# Altium PCB 莱洛三角形PCB_2022-04-17.pcbdoc (part 1 of 2)
Units mm, origin at the board's own origin, x right, y up, seen from the top; angles counter-clockwise.
Board outline 174.24 x 150.62 mm, 2 copper layers (Top Layer, Bottom Layer); 157 components, 93 nets, 468 pads, 212 vias.
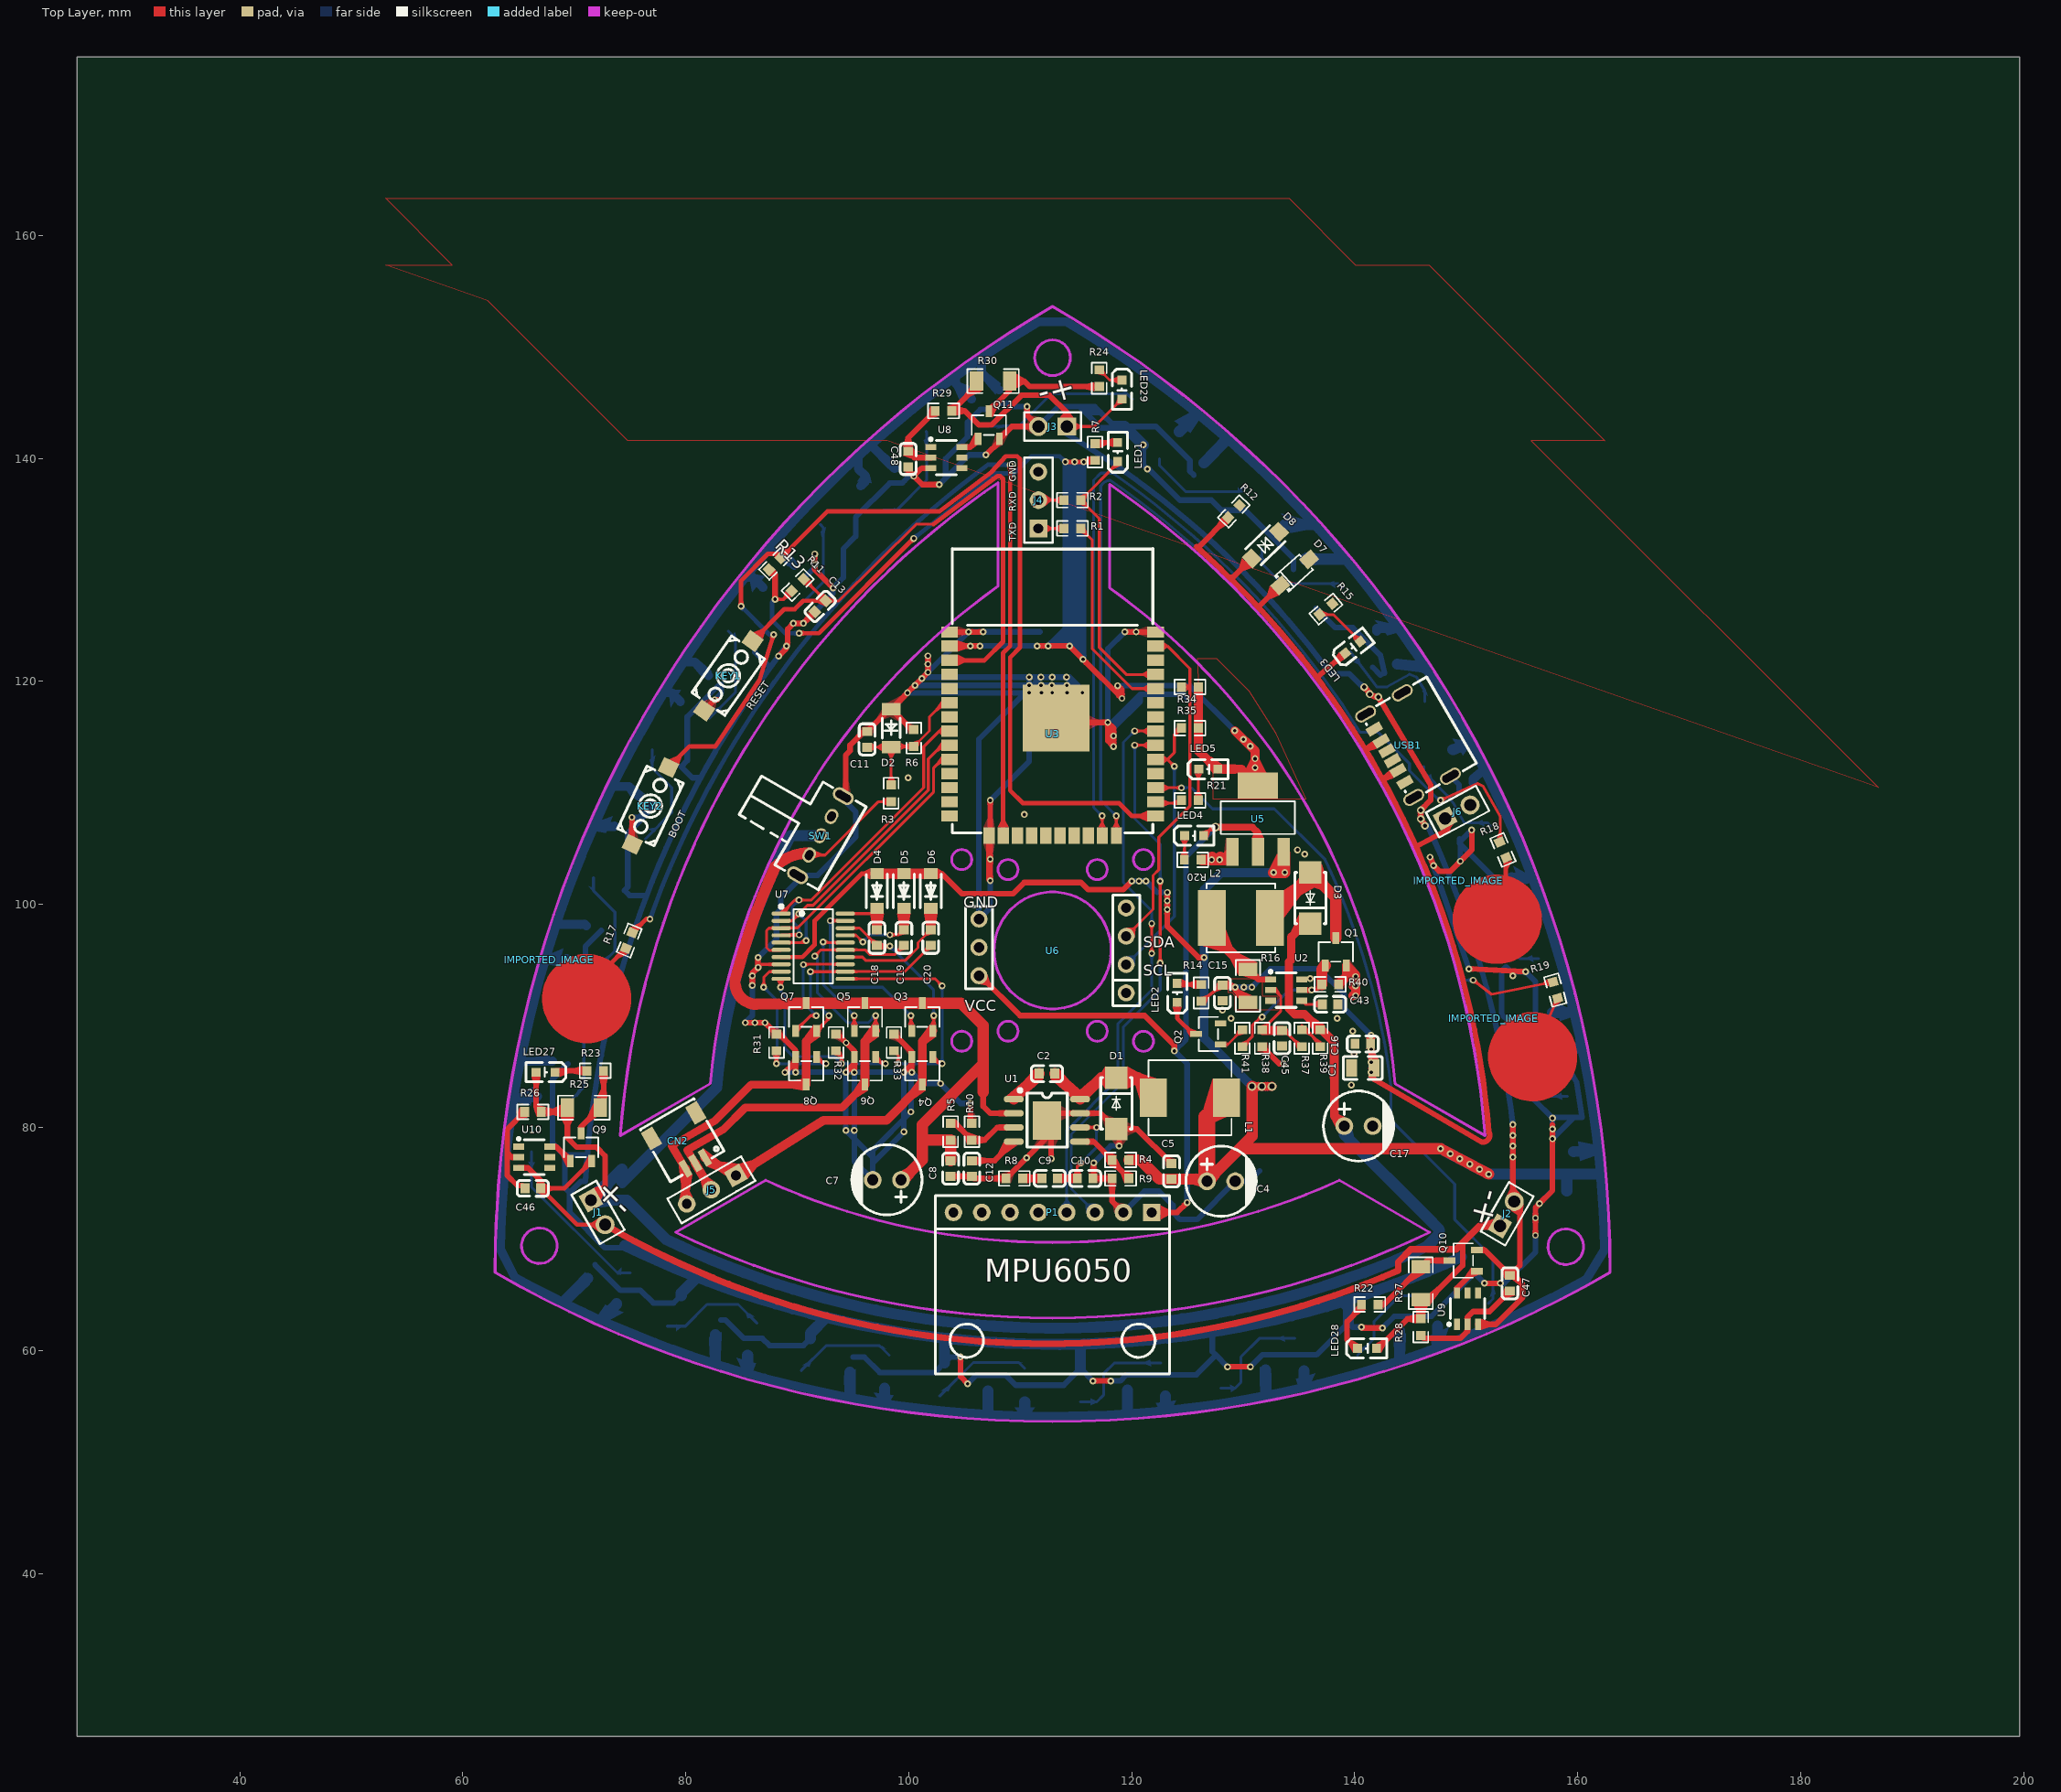
[diagram p0: Top Layer view]
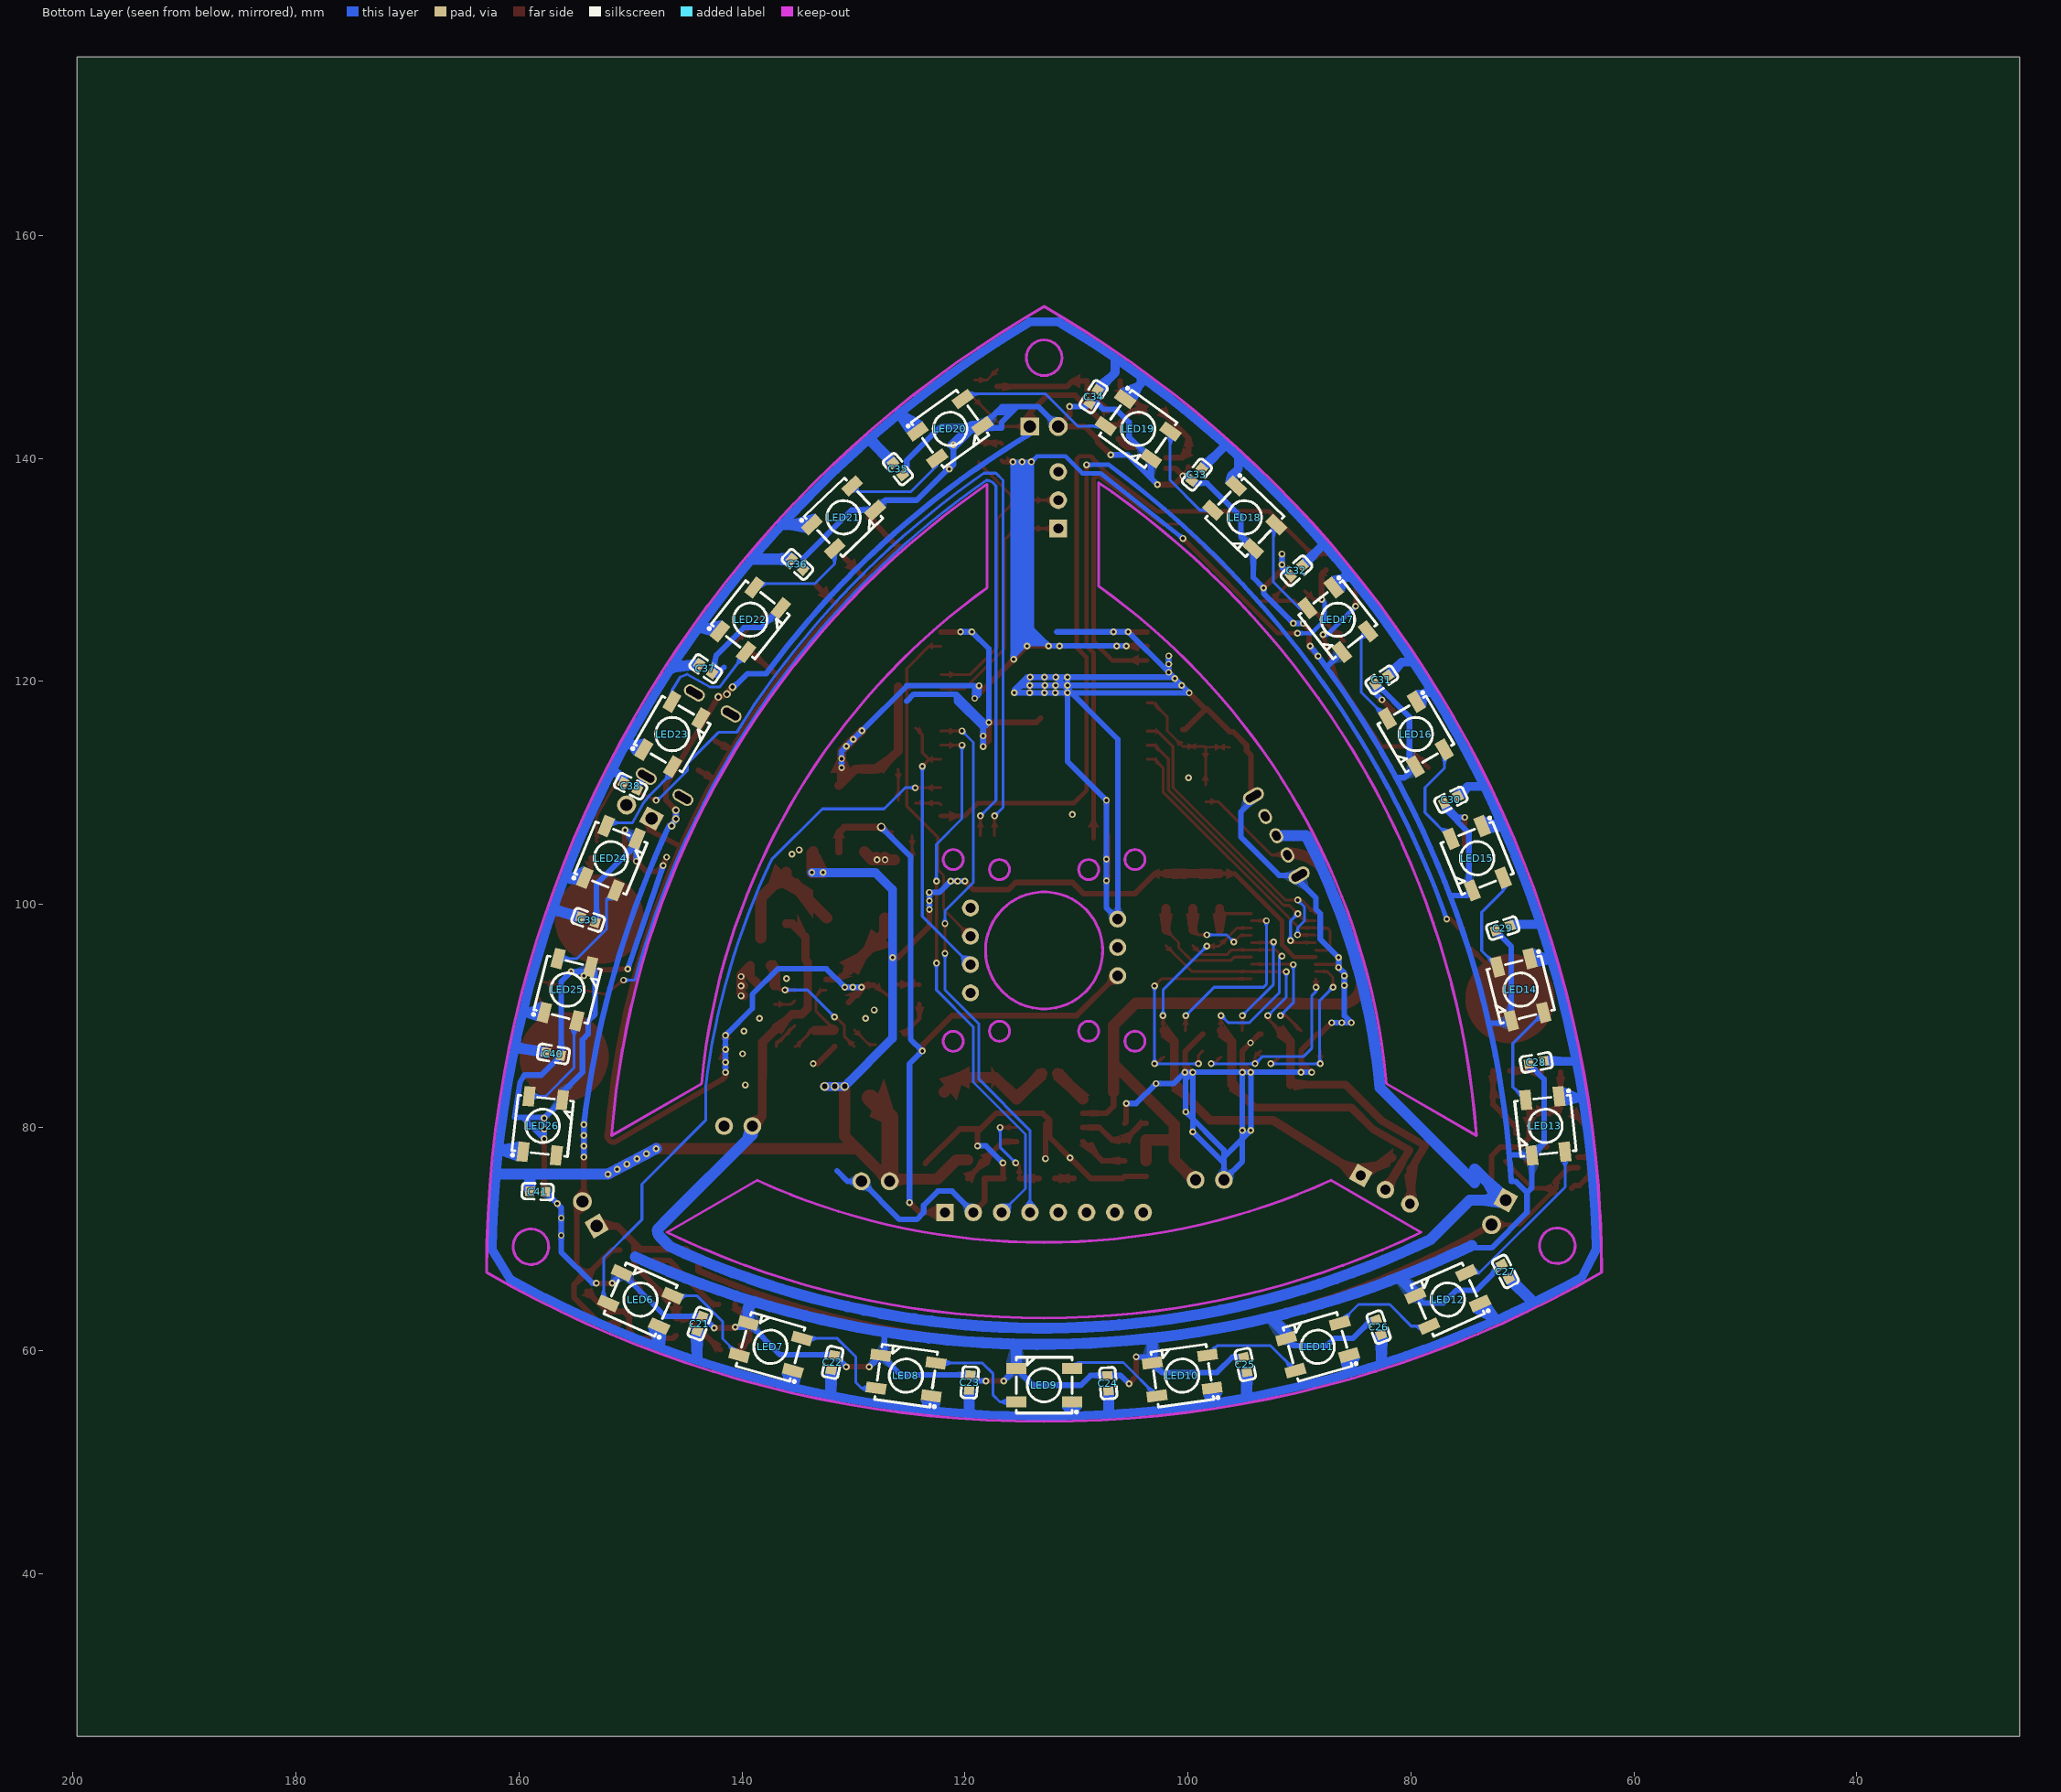
[diagram p1: Bottom Layer view, seen from below]

## Layer stack, top to bottom
Top Layer: signal copper (thickness not stored)
Dielectric: dielectric 0.32, FR-4, Dk 4.8
Bottom Layer: signal copper (thickness not stored)

## Board outline
199.644,25.4 25.4,25.4 25.4,176.022 199.644,176.022

## Components (designator, comment, footprint, x,y, rotation, side; value= is the part's Value field where it differs from the comment)
C1 "22UF" C0805 140.716,85.331 r0 top
C2 "100nF" C0603#1 112.395,84.823 r180 top
C4 "47uF" CAP-TH_BD6.3-P2.50-D1.0-FD 128.016,75.171 r0 top
C5 "100nF" C0603#1 123.571,76.06 r270 top
C7 "47uF" CAP-TH_BD6.3-P2.50-D1.0-FD 98.044,75.298 r180 top
C8 "10nF" C0603#1 103.759,76.314 r90 top
C9 "1nF" C0603#1 112.653,75.425 r0 top
C10 "47pF" C0603#1 115.821,75.425 r180 top
C11 "10nF" C0603#1 96.266,114.795 r270 top
C12 "10nF" C0603#1 105.664,76.314 r90 top
C13 "100nF" C0603#1 92.075,126.733 r45 top
C15 "1uF" C0603#1 128.143,92.062 r90 top
C16 "100nF" C0603#1 140.716,87.49 r180 top
C17 "100uF" CAP-TH_BD6.3-P2.50-D1.0-FD 140.335,80.124 r0 top
C18 "100nF" C0603#1 97.155,97.015 r90 top
C19 "100nF" C0603#1 99.568,97.015 r90 top
C20 "100nF" C0603#1 101.981,97.015 r90 top
C21 "100nF" C0603#2 143.78,62.4 r110.3 bottom
C22 "100nF" C0603#2 131.863,58.915 r102.3 bottom
C23 "100nF" C0603#2 119.576,57.123 r94.3 bottom
C24 "100nF" C0603#2 107.16,57.058 r86.3 bottom
C25 "100nF" C0603#2 94.855,58.721 r78.3 bottom
C26 "100nF" C0603#2 82.902,62.081 r70.3 bottom
C27 "100nF" C0603#2 71.532,67.072 r62.3 bottom
C28 "100nF" C0603#2 68.755,85.827 r350 bottom
C29 "100nF" C0603#2 71.759,97.875 r342 bottom
C30 "100nF" C0603#2 76.41,109.387 r334 bottom
C31 "100nF" C0603#2 82.619,120.14 r326 bottom
C32 "100nF" C0603#2 90.263,129.925 r318 bottom
C33 "100nF" C0603#2 99.195,138.55 r310 bottom
C34 "100nF" C0603#2 108.458,145.542 r302 bottom
C35 "100nF" C0603#2 126.014,139.047 r230.5 bottom
C36 "100nF" C0603#2 135.021,130.5 r222.5 bottom
C37 "100nF" C0603#2 143.256,121.145 r214.5 bottom
C38 "100nF" C0603#2 149.987,110.604 r206.5 bottom
C39 "100nF" C0603#2 153.804,98.612 r198.5 bottom
C40 "100nF" C0603#2 156.913,86.591 r190.5 bottom
C41 "100nF" C0603#2 158.318,74.254 r182.5 bottom
C43 "4.7uF" C0603#1 137.795,91.046 r180 top
C45 "22pF" C0603#1 133.477,87.998 r270 top
C46 "100nF" C0603#1 66.294,74.536 r0 top
C47 "100nF" C0603#1 153.924,66.027 r90 top
C48 "100nF" C0603#1 99.949,139.941 r270 top
CN2 "M1010RS-03P" CONN-SMD_M1010RS-03P 79.883,78.473 r210 top
D1 "SS34_C8678" DO-214AC_L4.3-W2.7-LS5.3-RD 118.618,82.156 r270 top
D2 "ZMM3V3" LL-34_L3.5-W1.5-RD 98.425,115.811 r90 top
D3 "SS34_C8678" DO-214AC_L4.3-W2.7-LS5.3-RD 136.017,100.571 r90 top
D4 "SM4007PL" SOD-123F_L2.8-W1.8-LS3.7-RD 97.155,101.206 r90 top
D5 "SM4007PL" SOD-123F_L2.8-W1.8-LS3.7-RD 99.568,101.206 r90 top
D6 "SM4007PL" SOD-123F_L2.8-W1.8-LS3.7-RD 101.981,101.206 r90 top
D7 "SMF5.0A_C908213" SOD-123FL_L2.7-W1.8-LS3.8-RD 134.62,129.781 r41.9 top
D8 "SJD12C6.5L01" SOD-123_L2.8-W1.8-LS3.7-BI 131.991,132.223 r224.2 top
IMPORTED_IMAGE "IMPORTED_IMAGE" IMPORTED_IMAGE 67.755,95.03 r0 top
IMPORTED_IMAGE "IMPORTED_IMAGE" IMPORTED_IMAGE 152.467,89.798 r0 top
IMPORTED_IMAGE "IMPORTED_IMAGE" IMPORTED_IMAGE 149.288,102.125 r0 top
J1 "HDR-M-2.54_1x2" HDR-M-2.54_1X2 72.136,72.377 r300 top
J2 "HDR-M-2.54_1x2" HDR-M-2.54_1X2 153.67,72.25 r60 top
J3 "HDR-M-2.54_1x2" HDR-M-2.54_1X2 112.903,142.862 r180 top
J4 "HDR-M-2.54_1x3" HDR-M-2.54_1X3 111.633,136.258 r90 top
J5 "HDR-M-2.54_1x3" HDR-M-2.54_1X3 82.296,74.409 r210 top
J6 "HDR-M-2.54_1x2" HDR-M-2.54_1X2 149.225,108.318 r28 top
KEY1 "K2-3.6×6.1_SMD" KEY-SMD_2P-L6.2-W3.6-LS8.0 83.819,120.51 r235 top
KEY2 "K2-3.6×6.1_SMD" KEY-SMD_2P-L6.2-W3.6-LS8.0 76.834,108.826 r245 top
L1 "6.8uH" IND-SMD_L7.3-W6.6 125.222,82.664 r180 top
L2 "22uH" IND-SMD_L6.0-W6.0_SWPA6045S 129.794,98.793 r180 top
LED1 "19-217/BHC-ZL1M2RY/3T" LED0603-R-RD 118.745,140.576 r90 top
LED2 "19-217/BHC-ZL1M2RY/3T" LED0603-R-RD 124.079,92.062 r90 top
LED3 "19-217/BHC-ZL1M2RY/3T" LED0603-R-RD 139.827,123.05 r38 top
LED4 "19-217/BHC-ZL1M2RY/3T" LED0603-R-RD 125.603,106.159 r0 top
LED5 "19-217/BHC-ZL1M2RY/3T" LED0603-R-RD 126.873,112.128 r0 top
LED6 "WS2812E" LED-SMD_4P-L5.0-W5.0-TL 149.103,64.567 r204 bottom
LED7 "WS2812E" LED-SMD_4P-L5.0-W5.0-TL 137.435,60.32 r196 bottom
LED8 "WS2812E" LED-SMD_4P-L5.0-W5.0-TL 125.289,57.738 r188 bottom
LED9 "WS2812E" LED-SMD_4P-L5.0-W5.0-TL 112.903,56.883 r180 bottom
LED10 "WS2812E" LED-SMD_4P-L5.0-W5.0-TL 100.517,57.738 r172 bottom
LED11 "WS2812E" LED-SMD_4P-L5.0-W5.0-TL 88.371,60.32 r164 bottom
LED12 "WS2812E" LED-SMD_4P-L5.0-W5.0-TL 76.703,64.567 r156 bottom
LED13 "WS2812E" LED-SMD_4P-L5.0-W5.0-TL 67.94,80.138 r83.7 bottom
LED14 "WS2812E" LED-SMD_4P-L5.0-W5.0-TL 70.161,92.355 r75.7 bottom
LED15 "WS2812E" LED-SMD_4P-L5.0-W5.0-TL 74.059,104.144 r67.7 bottom
LED16 "WS2812E" LED-SMD_4P-L5.0-W5.0-TL 79.561,115.275 r59.7 bottom
LED17 "WS2812E" LED-SMD_4P-L5.0-W5.0-TL 86.558,125.532 r51.7 bottom
LED18 "WS2812E" LED-SMD_4P-L5.0-W5.0-TL 94.914,134.716 r43.7 bottom
LED19 "WS2812E" LED-SMD_4P-L5.0-W5.0-TL 104.468,142.648 r35.7 bottom
LED20 "WS2812E" LED-SMD_4P-L5.0-W5.0-TL 121.338,142.648 r324.3 bottom
LED21 "WS2812E" LED-SMD_4P-L5.0-W5.0-TL 130.892,134.716 r316.3 bottom
LED22 "WS2812E" LED-SMD_4P-L5.0-W5.0-TL 139.248,125.532 r308.3 bottom
LED23 "WS2812E" LED-SMD_4P-L5.0-W5.0-TL 146.245,115.275 r300.3 bottom
LED24 "WS2812E" LED-SMD_4P-L5.0-W5.0-TL 151.747,104.144 r292.3 bottom
LED25 "WS2812E" LED-SMD_4P-L5.0-W5.0-TL 155.645,92.355 r284.3 bottom
LED26 "WS2812E" LED-SMD_4P-L5.0-W5.0-TL 157.866,80.138 r276.3 bottom
LED27 "19-217/BHC-ZL1M2RY/3T" LED0603-R-RD 67.436,84.95 r180 top
LED28 "19-217/BHC-ZL1M2RY/3T" LED0603-R-RD 141.097,60.185 r0 top
LED29 "19-217/BHC-ZL1M2RY/3T" LED0603-R-RD 119.126,146.177 r270 top
P1 "MPU6050模块" MPU6050模块 104.012,72.377 r270 top
Q1 "AO3400A" SOT-23-3_L2.9-W1.6-P1.90-LS2.8-BR 138.303,95.745 r270 top
Q2 "S8050_C2146" SOT-23-3_L3.0-W1.7-P0.95-LS2.9-BR 126.873,88.379 r0 top
Q3 "AO3400A" SOT-23-3_L2.9-W1.6-P1.90-LS2.8-BR 101.219,89.903 r270 top
Q4 "AO3400A" SOT-23-3_L2.9-W1.6-P1.90-LS2.8-BR 101.219,85.077 r90 top
Q5 "AO3400A" SOT-23-3_L2.9-W1.6-P1.90-LS2.8-BR 96.075,89.903 r270 top
Q6 "AO3400A" SOT-23-3_L2.9-W1.6-P1.90-LS2.8-BR 96.075,85.077 r90 top
Q7 "AO3400A" SOT-23-3_L2.9-W1.6-P1.90-LS2.8-BR 90.805,89.903 r270 top
Q8 "AO3400A" SOT-23-3_L2.9-W1.6-P1.90-LS2.8-BR 90.805,85.077 r90 top
Q9 "AO3400A" SOT-23-3_L2.9-W1.6-P1.90-LS2.8-BR 70.612,78.219 r270 top
Q10 "AO3400A" SOT-23-3_L2.9-W1.6-P1.90-LS2.8-BR 149.733,68.059 r0 top
Q11 "AO3400A" SOT-23-3_L2.9-W1.6-P1.90-LS2.8-BR 107.188,142.989 r270 top
R1 "120" R0603 114.681,133.718 r180 top
R2 "120" R0603 114.681,136.258 r180 top
R3 "62K" R0603 98.425,109.969 r270 top
R4 "56K" R0603 118.999,77.076 r0 top
R5 "62K" R0603 103.759,79.616 r270 top
R6 "10K" R0603 100.457,114.922 r270 top
R7 "10K" R0603 116.713,140.576 r270 top
R8 "27K" R0603 109.474,75.425 r0 top
R9 "10K" R0603 118.999,75.425 r0 top
R10 "10K" R0603 105.664,79.616 r270 top
R11 "10K" R0603 90.043,128.638 r45 top
R12 "1K" R0603 129.159,135.242 r46.5 top
R13 "4.7K" R0603 88.011,130.556 r225 top
R14 "10K" R0603 126.238,92.062 r270 top
R15 "10K" R0603 137.414,126.479 r220 top
R16 "0.1" R1206 130.429,92.697 r90 top
R17 "470" R0603 74.93,96.761 r68 top
R18 "470" R0603 153.289,104.889 r113 top
R19 "470" R0603 157.988,92.316 r106 top
R20 "10K" R0603 125.476,104 r180 top
R21 "10K" R0603 125.222,109.334 r0 top
R22 "10K" R0603 141.351,64.122 r180 top
R23 "10K" R0603 71.882,85.077 r180 top
R24 "10K" R0603 117.094,147.193 r90 top
R25 "47" R1206 70.866,81.775 r180 top
R26 "1K" R0603 66.294,81.394 r0 top
R27 "47" R1206 145.923,66.027 r270 top
R28 "1K" R0603 145.923,62.09 r90 top
R29 "1K" R0603 103.124,144.259 r0 top
R30 "47" R1206 107.569,146.939 r180 top
R31 "10K" R0603 88.138,87.617 r270 top
R32 "10K" R0603 93.472,87.617 r270 top
R33 "10K" R0603 98.679,87.617 r270 top
R34 "4.7K" R0603 125.222,119.494 r0 top
R35 "4.7K" R0603 125.222,115.811 r0 top
R37 "300" R0603 135.255,87.998 r90 top
R38 "1.2K" R0603 131.699,87.998 r270 top
R39 "11K" R0603 136.906,87.998 r90 top
R40 "10K" R0603 137.795,92.824 r180 top
R41 "10K" R0603 129.921,87.998 r270 top
SW1 "SK-12D02-VG5" SW-TH_SK-12D02-VG5 92.075,106.159 r240 top
U1 "TPS54331DR" SOIC-8_L5.0-W4.0-P1.27-LS6.0-BL-EP 112.394,80.632 r270 top
U2 "CN3300" SOT-23-6_L2.9-W1.6-P0.95-LS2.8-BL 133.858,92.316 r270 top
U3 "ESP-WROOM-32" WIFIM-SMD_ESP-WROOM-32 112.903,115.303 r0 top
U5 "AMS1117-3.3" SOT-223-3_L6.5-W3.4-P2.30-LS7.0-BR 131.318,107.683 r270 top
U6 "AS5600_Modle" AS5600_MODLE 112.903,95.872 r0 top
U7 "EG2133" TSSOP-20_L6.5-W4.4-P0.65-LS6.4-BL 91.44,96.253 r270 top
U8 "CM1010-A" SOT-23-6_L2.9-W1.6-P0.95-LS2.8-BR 103.378,140.068 r180 top
U9 "CM1010-A" SOT-23-6_L2.9-W1.6-P0.95-LS2.8-BR 150.114,63.741 r270 top
U10 "CM1010-A" SOT-23-6_L2.9-W1.6-P0.95-LS2.8-BR 66.421,77.33 r180 top
USB1 "TYPE-603-T3" USB-C-SMD_TYPE-603-T3 144.78,114.287 r120 top

## Footprints (in the part's own frame and the unit in brackets; to place one, negate y for a bottom-side part, rotate by r counter-clockwise, add the part's x,y. Pads: shape width x height; smd on the part's side, far side on the other; paste and mask are expansions set on the pad)
AS5600_MODLE [mil]
  round 60 hole 36: 1(-259.85,110.63) 2(-259.85,10.63) 3(-259.85,-89.37) 4(259.84,150) 5(259.84,50) 6(259.84,-50) 7(259.84,-150)
  silkscreen extent -307,-195 308,195
C0603#1 [mm]
  rect 0.8x0.9 smd: 1(-0.7,0) 2(0.7,0)
  silkscreen extent -1.41,-0.71 1.39,0.72
C0603#2 [mm]
  rect 0.8x0.9 smd: 1(0.7,0) 2(-0.7,0)
  silkscreen extent -1.39,-0.72 1.41,0.71
C0805 [mm]
  rect 1x1.55 smd: 1(-1,0) 2(1,0)
  silkscreen extent -1.75,-1.04 1.75,1.04
CAP-TH_BD6.3-P2.50-D1.0-FD [mm]
  round 1.6 hole 1: 1(-1.27,0) 2(1.27,0)
  silkscreen extent -3.15,-3.15 3.17,3.15
CONN-SMD_M1010RS-03P [mm]
  rect 0.6x1.55 smd: 1(-1,1.937) 2(0,1.937) 3(1,1.937)
  rect 1.2x1.8 smd: 4(2.3,-1.938) 5(-2.3,-1.938)
  silkscreen extent -2.79,-3.14 2.75,2.29
DO-214AC_L4.3-W2.7-LS5.3-RD [mm]
  rect 2x2 smd: 1(-2.3,0) 2(2.3,0)
  silkscreen extent -2.3,-1.4 2.3,1.4
HDR-M-2.54_1X2 [mm]
  rect 1.7x1.575 hole 1.1: 1(-1.27,0)
  round 1.7 hole 1.1: 2(1.27,0)
  silkscreen extent -2.54,-1.27 2.54,1.27
HDR-M-2.54_1X3 [mil]
  rect 62x62 hole 35: 1(-100,0)
  round 62 hole 35: 2(0,0) 3(100,0)
  silkscreen extent -150,-50 150,50
IMPORTED_IMAGE [mm]
IND-SMD_L6.0-W6.0_SWPA6045S [mm]
  rect 2.474x5.02 smd: 1(2.603,0) 2(-2.603,0)
  silkscreen extent -3.08,-3.08 3.08,3.08
IND-SMD_L7.3-W6.6 [mm]
  rect 2.424x3.42 smd: 1(3.278,0) 2(-3.278,0)
  silkscreen extent -3.73,-3.38 3.73,3.38
KEY-SMD_2P-L6.2-W3.6-LS8.0 [mm]
  rect 1.4x1.5 smd: 1(-3.8,0) 2(3.8,0)
  silkscreen extent -3.1,-1.8 3.1,1.8
LED0603-R-RD [mm]
  rect 0.8x0.8 smd: 1(0.851,0) 2(-0.851,0)
  silkscreen extent -1.82,-0.86 1.77,0.86
LED-SMD_4P-L5.0-W5.0-TL [mm]
  rect 1.8x1 smd: 1(2.5,-1.5) 2(2.5,1.5) 3(-2.5,1.5) 4(-2.5,-1.5)
  silkscreen extent -2.5,-2.5 3,2.5
LL-34_L3.5-W1.5-RD [mm]
  rect 1.1x1.7 smd: 1(-1.7,0) 2(1.7,0)
  silkscreen extent -0.9,-0.8 0.9,0.8
MPU6050模块 [mil]
  rect 62x62 hole 35: 1(0,700)
  round 62 hole 35: 2(0,600) 3(0,500) 4(0,400) 5(0,300) 6(0,200) 7(0,100) 8(0,0)
  silkscreen extent -59,-63 571,763
R0603 [mm]
  rect 0.806x0.864 smd: 1(-0.753,0) 2(0.753,0)
  silkscreen extent -1.39,-0.66 1.39,0.66
R1206 [mm]
  rect 1.208x1.701 smd: 1(-1.479,0) 2(1.479,0)
  silkscreen extent -2.31,-1.08 2.31,1.08
SOD-123_L2.8-W1.8-LS3.7-BI [mm]
  rect 1.2x1.4 smd: 1(-1.7,0) 2(1.7,0)
  silkscreen extent -1.5,-1 1.5,1
SOD-123F_L2.8-W1.8-LS3.7-RD [mm]
  rect 1x1.2 smd: 1(-1.55,0) 2(1.55,0)
  silkscreen extent -1.52,-0.93 1.49,0.95
SOD-123FL_L2.7-W1.8-LS3.8-RD [mm]
  rect 1.4x1.2 smd: 1(-1.735,0) 2(1.735,0)
  silkscreen extent -1.6,-1 1.38,1
SOIC-8_L5.0-W4.0-P1.27-LS6.0-BL-EP [mm]
  oval 0.6x1.8 smd: 1(-1.905,-2.972) 2(-0.635,-2.972) 3(0.635,-2.972) 4(1.905,-2.972) 5(1.905,2.972) 6(0.635,2.972) 7(-0.635,2.972) 8(-1.905,2.972)
  rect 3.45x2.56 smd: 9(0,0)
  silkscreen extent -2.84,-2.56 2.39,1.83
SOT-23-3_L2.9-W1.6-P1.90-LS2.8-BR [mm]
  rect 1.07x0.6 smd: 1(1.235,-0.95) 2(1.235,0.95) 3(-1.235,0)
  silkscreen extent -0.88,-1.54 0.88,1.54
SOT-23-3_L3.0-W1.7-P0.95-LS2.9-BR [mm]
  rect 1.037x0.532 smd: 1(1.101,-0.95) 2(1.101,0.95) 3(-1.101,0)
  silkscreen extent -0.86,-1.53 0.86,1.53
SOT-23-6_L2.9-W1.6-P0.95-LS2.8-BL [mm]
  rect 0.55x1 smd: 1(-0.95,-1.4) 2(0,-1.4) 3(0.95,-1.4) 4(0.95,1.4) 5(0,1.4) 6(-0.95,1.4)
  silkscreen extent -1.78,-1.52 1.55,0.9
SOT-23-6_L2.9-W1.6-P0.95-LS2.8-BR [mm]
  rect 1x0.55 smd: 1(1.4,-0.95) 2(1.4,0) 3(1.4,0.95) 4(-1.4,0.95) 5(-1.4,0) 6(-1.4,-0.95)
  silkscreen extent -0.9,-1.78 1.52,1.55
SOT-223-3_L6.5-W3.4-P2.30-LS7.0-BR [mm]
  rect 2.5x1.1 smd: 1(2.97,-2.3) 2(2.97,0) 3(2.97,2.3)
  rect 2.34x3.6 smd: 4(-2.97,0)
  silkscreen extent -1.57,-3.33 1.37,3.33
SW-TH_SK-12D02-VG5 [mm]
  oval 1.4x1.1 hole 0.7 slot 0.9 at 0 deg: 1(-2,0.001) 2(0,0) 3(2,-0.001)
  oval 1.2x2 hole 0.7 slot 1.5 at 90 deg: 4(4.1,0) 5(-4.1,0)
  silkscreen extent -4.3,-7.25 4.3,2.27
TSSOP-20_L6.5-W4.4-P0.65-LS6.4-BL [mm]
  oval 0.364x1.742 smd: 1(-2.925,-2.871) 2(-2.275,-2.871) 3(-1.625,-2.871) 4(-0.975,-2.871) 5(-0.325,-2.871) 6(0.325,-2.871) 7(0.975,-2.871) 8(1.625,-2.871) 9(2.275,-2.871) 10(2.925,-2.871) 11(2.925,2.871) 12(2.275,2.871) 13(1.625,2.871) 14(0.975,2.871) 15(0.325,2.871) 16(-0.325,2.871) 17(-0.975,2.871) 18(-1.625,2.871) 19(-2.275,2.871) 20(-2.925,2.871)
  silkscreen extent -3.71,-3.02 3.33,1.77
USB-C-SMD_TYPE-603-T3 [mm]
  oval 1.1x2 hole 0.7 slot 1.6 at 90 deg: 0(-4.32,-1.901) 0(-4.32,1.899) 0(4.32,1.899) 0(4.32,-1.901)
  rect 0.8x1.4 smd: A5(-0.5,1.897) A9(1.52,1.898) A12(2.75,1.899) B5(0.5,1.897) B9(-1.52,1.901) B12(-2.75,1.899)
  silkscreen extent -4.47,-4.5 4.47,2.3
WIFIM-SMD_ESP-WROOM-32 [mil]
  rect 59.1x39.4 smd: 1(-364,359.5) 2(-364,309.5) 3(-364,259.5) 4(-364,209.5) 5(-364,159.5) 6(-364,109.5) 7(-364,59.5) 8(-364,9.5) 9(-364,-40.5) 10(-364,-90.5) 11(-364,-140.5) 12(-364,-190.5) 13(-364,-240.5) 14(-364,-290.5) 25(364,-290.5) 26(364,-240.5) 27(364,-190.5) 28(364,-140.5) 29(364,-90.5) 30(364,-40.5) 31(364,9.5) 32(364,59.5) 33(364,109.5) 34(364,159.5) 35(364,209.5) 36(364,259.5) 37(364,309.5) 38(364,359.5)
  rect 39.4x59.1 smd: 15(-224,-359.5) 16(-174,-359.5) 17(-124,-359.5) 18(-74,-359.5) 19(-24,-359.5) 20(26,-359.5) 21(76,-359.5) 22(126,-359.5) 23(176,-359.5) 24(226,-359.5)
  rect 236.2x236.2 smd: 39(12,55.5)
  silkscreen extent -354,-350 354,654

## Via types
v1: diameter 0.61, hole 0.305, Top Layer to Bottom Layer, tented both sides, 202 vias
v2: diameter 0.7, hole 0.4, Top Layer to Bottom Layer, tented both sides, 6 vias
v3: diameter 0.8, hole 0.5, Top Layer to Bottom Layer, tented both sides, 4 vias

## Nets (pads, with @x,y where several pads share a name; then routed paths per layer and width w, separated by ;. In a path a pad name is that pad's centre, name@x,y a point inside that pad or via, vN(x,y) a via of type N, cw(c..) or ccw(c..) an arc to the next point about the centre after c; other vN are vias at no path point)
5VIN: C1.2 C15.2 C16.1 D7.1 D8.2 J6.1 LED3.1 R12.1 R14.2 R16.1 U2.3 USB1.A9 USB1.B9 | length 122.7
  Top Layer w0.305: R14.2@126.237,91.31 C15.2@128.142,92.763
  Top Layer w0.5: C15.2@128.142,92.763 128.887,92.763 R16.1@130.429,91.218 ; R12.1@128.641,134.696 126.032,132.087 125.798,132.087 cw(c73.709,73.27) 152.019,79.616 ; 128.744,129.341 129.075,129.341 D8.2@130.772,131.038 ; 131.249,126.768 131.475,126.768 D7.1@133.329,128.622 ; 136.608,120.35 139.156,122.527 ; 140.962,113.886 USB1.A9@142.376,114.655 ; v1(141.478,84.95) 141.477,84.569 141.731,84.315 151.393,78.684 ; v1(141.478,86.982) 141.508,86.982 C1.2@141.508,85.361 ; C1.2@141.477,84.569 v1(141.478,84.95) 141.478,85.334 C1.2@141.507,85.362 ; v1(141.478,85.839) 141.507,85.81 C1.2@141.507,85.362 ; v1(141.478,86.982) v1(141.478,88.252) ; 142.506,111.216 USB1.B9@143.893,112.021 ; 145.503,105.184 148.335,106.667 J6.1@148.104,107.722 ; 151.394,78.685 ccw(c151.471,79.308) 152.018,79.616
  Bottom Layer w0.5: v1(129.286,92.57) v1(130.062,92.57) v1(130.773,92.57) ; v1(130.773,92.57) 132.425,94.221 136.778,94.221 139.064,91.935 139.064,90.665 v1(141.478,88.252) v1(141.478,84.95)
+3.3V: LED4.1 LED5.1 P1.1 R7.2 R11.1 R13.2 R34.2 R35.2 U3.2 U5.2 U5.4 U6.3 | length 223
  Top Layer w0.3: v1(88.011,127.368) 88.772,127.368 R11.1@89.511,128.105 ; LED4.1@126.454,106.159 127.228,106.934 v3(127.508,106.934)
  Top Layer w0.4: v1(90.17,124.32) 91.948,124.32 v1(100.457,132.829) ; v1(114.046,139.687) v1(115.697,139.687) ; v1(115.697,139.687) 116.578,139.687 R7.2@116.712,139.824
  Top Layer w0.5: R13.2@87.606,130.01 88.01,129.606 v1(88.011,127.368) ; U3.2@103.657,123.164 v1(106.393,123.177) ; U6.3@106.303,93.602 106.41,93.601 109.981,90.03 121.157,90.03 123.824,87.363 v1(123.825,86.855) ; v1(111.506,123.177) v1(112.49,123.177) v1(114.427,123.177) v1(115.632,121.972) v1(119.126,118.478) ; P1.1@121.792,72.377 124.078,72.377 v1(124.968,73.266) ; v1(119.126,118.478) 119.126,119.24 v1(118.745,119.621) 118.745,118.859 v1(119.126,118.478)
  Top Layer w0.635: v3(127.508,106.934) 127.52,106.921 130.809,106.921 131.317,106.413 U5.2@131.318,104.713
  Top Layer w0.8: R34.2@125.975,119.494 R35.2@125.975,115.811 125.976,113.751 LED5.1@127.724,112.128 129.844,112.128 U5.4@131.318,110.653 131.063,110.906 v1(131.064,113.069) ; v1@129.245,115.575 131.063,113.779 v1@131.063,113.07
  Bottom Layer w0.4: v1(88.011,127.368) 87.757,127.114 87.757,125.463 88.9,124.32 v1(90.17,124.32) ; v1(100.457,132.829) 107.823,138.671 109.474,138.671 110.998,140.195 113.538,140.195 v1(114.046,139.687) v1(114.882,139.687) v1(115.697,139.687)
  Bottom Layer w0.5: v1(105.537,123.177) v1(106.393,123.177) v1(111.506,123.177) ; v1(114.046,139.687) 114.046,124.733 v1(112.49,123.177) ; v1(114.427,123.177) 114.882,123.632 v1(114.882,139.687) ; v1(115.632,121.972) 115.697,122.038 v1(115.697,139.687) ; v1(118.745,119.621) 118.745,118.859 v1(119.126,118.478) 119.126,119.621 125.222,119.621 ; v1(124.968,73.266) 124.968,85.712 v1(123.825,86.855) 124.883,87.913 124.883,104.308 v3(127.508,106.934) ; 125.198,119.621 129.245,115.574 v1(130.017,114.802) v1(130.637,114.182) 131.064,113.755 v1(131.064,113.069) v1(131.064,112.255) ; v1(111.506,123.177) v1(112.49,123.177) ; v1(111.506,123.177) v1(112.49,123.177) ; v1(111.506,123.177) v1(112.49,123.177)
  other v1: 129.245,115.574
+5V: C4.1 C5.2 C21.2 C22.2 C23.2 C24.2 C25.2 C26.2 C27.2 C28.2 C29.2 C30.2 C31.2 C32.2 C33.2 C34.2 C35.2 C36.2 C37.2 C38.2 C39.2 C40.2 C41.2 D4.2 D5.2 D6.2 L1.2 LED6.1 LED7.1 LED8.1 LED9.1 LED10.1 LED11.1 LED12.1 LED13.1 LED14.1 LED15.1 LED16.1 LED17.1 LED18.1 LED19.1 LED20.1 LED21.1 LED22.1 LED23.1 LED24.1 LED25.1 LED26.1 R4.2 U5.3 U7.7 | length 553.2
  Top Layer w0.4: U7.7@88.569,95.278 90.464,95.278 91.439,96.253 91.566,96.38 91.566,98.539 95.783,102.755 D4.2@97.155,102.756
  Top Layer w0.5: D6.2@101.981,102.756 102.971,102.755 104.139,101.587 104.774,100.952 109.346,100.952 110.362,101.968 115.442,101.968 116.077,101.333 119.253,101.333 v1(120.015,102.095) ; v1(123.19,99.555) 123.189,98.031 125.983,95.237 v1(126.492,95.237) ; v1(123.19,99.555) 123.19,100.952 v1(123.19,101.079)
  Top Layer w0.8: D4.2@97.155,102.756 D6.2@101.981,102.756 ; v3(130.792,83.68) v3(132.588,83.68)
  Top Layer w1: R4.2@119.752,77.076 120.776,77.076 122.493,75.361 123.57,75.361 126.557,75.361 C4.1@126.746,75.171 ; C4.1@126.746,75.171 129.667,78.092 ; v3(130.792,83.68) 130.792,79.217 129.667,78.092 ; v1(132.715,102.857) 133.619,103.761 U5.3@133.618,104.713 133.73,104.599 v1(133.731,102.857) ; v1(152.018,75.806) v1(147.701,78.092) 129.667,78.092 ; v1(132.715,102.857) v1(133.731,102.857) v1(132.715,102.857)
  Top Layer w1.5: C4.1@126.746,75.171 126.745,80.911 L1.2@128.5,82.664
  Bottom Layer w0.5: v1@120.038,102.095 v1(121.285,102.095) 122.301,101.079 v1(123.19,101.079) v1(123.19,99.555)
  Bottom Layer w0.8: 64.602,82.639 66.575,82.639 LED13.1@66.725,82.788 ; 65.186,85.935 C28.2@68.066,85.948 ; 67.416,95.077 69.255,95.077 LED14.1@69.326,95.148 ; 68.396,98.211 70.972,98.211 C29.2@71.094,98.092 ; 71.775,107 73.593,107 LED15.1@73.621,107.025 ; 73.431,110.571 74.904,110.571 C30.2@75.781,109.694 ; 78.048,118.986 78.732,118.986 LED16.1@79.527,118.19 ; 79.801,121.739 80.83,121.739 C31.2@82.039,120.533 ; 85.343,129.341 86.014,129.341 LED17.1@86.93,128.424 ; 87.751,132.219 87.916,132.219 C32.2@89.743,130.393 ; 95.475,140.172 95.475,139.08 96.138,138.417 96.138,137.98 LED18.1@95.686,137.528 ; 96.786,141.358 96.786,141.043 C33.2@98.744,139.087 ; 104.19,147.33 104.19,146.756 LED19.1@105.623,145.326 ; 106.529,148.988 106.529,147.693 C34.2@108.087,146.136 ; 114.208,152.226 cw(c62.865,66.916) 162.41,69.075 ; 114.217,152.241 111.628,152.268 ccw(c162.941,66.916) 63.375,69.072 64.673,66.565 ccw(c112.903,153.657) 160.798,66.38 162.409,69.075 ; v3@131.033,83.68 v3(132.588,83.68) v3(130.792,83.68) 126.492,87.98 v1(126.492,95.237) 126.492,101.333 128.016,102.857 v1(132.715,102.857) v1(133.731,102.857) ; LED22.1@141.975,124.5 141.975,124.754 143.807,124.754 ; C38.2@150.613,110.916 150.614,111.257 151.589,112.082
  Bottom Layer w1: 69.087,64.376 71.165,66.454 C27.2@71.206,66.454 ; 72.516,62.852 73.809,64.145 LED12.1@73.81,64.213 ; 82.666,58.915 C26.2@82.666,61.422 ; 85.554,58.153 LED11.1@85.555,59.567 ; C25.2@94.713,58.036 94.741,55.994 ; 97.789,55.486 LED10.1@97.832,56.601 ; 107.114,54.343 C24.2@107.114,56.359 ; 110.403,54.343 LED9.1@110.403,55.384 ; 119.628,54.47 C23.2@119.628,56.426 ; 123.022,54.597 LED8.1@123.022,55.905 ; LED20.1@124.244,142.407 124.294,142.407 125.833,143.985 ; C35.2@126.458,139.588 128.523,141.699 ; 132.011,55.994 C22.2@132.012,58.231 ; LED21.1@133.735,134.073 136.382,134.074 ; 135.445,56.756 LED7.1@135.445,58.189 ; C36.2@135.537,130.973 139.006,130.972 ; C37.2@143.833,121.542 146.164,121.287 146.273,121.178 ; 144.022,59.296 C21.2@144.022,61.744 ; 147.429,60.439 LED6.1@147.429,62.179 ; v1(147.701,78.092) v1(148.571,77.631) v1(149.41,77.187) v1(150.312,76.709) v1(151.197,76.24) v1(152.018,75.806) 161.671,75.806 ; LED23.1@148.803,113.873 149.859,114.287 ; LED24.1@154.083,102.4 155.447,102.349 ; C39.2@154.468,98.834 156.463,99.428 ; C40.2@157.601,86.719 159.892,87.109 ; LED25.1@157.716,90.303 159.13,90.284 ; C41.2@159.019,74.284 159.019,75.806 ; LED26.1@159.631,77.818 161.543,77.965
  other v1: 123.19,100.317 120.65,102.095
  other v3: 131.663,83.68
ADC_BAT: C11.2 D2.1 R3.1 R6.2 U3.6 | length 13.2
  Top Layer w0.254: C11.2@96.265,114.096 D2.1@98.425,114.111 ; R3.1@98.424,110.723 D2.1@98.425,114.111 ; U3.6@103.657,118.084 103.111,118.084 101.853,116.827 101.853,115.567 100.456,114.17 98.483,114.17 D2.1@98.425,114.111
B1+: C47.2 J2.2 J3.1 LED29.1 Q10.2 R29.2 R30.2 U9.3 | length 132.5
  Top Layer w0.254: J3.1@114.173,142.862 116.662,142.862 LED29.1@119.126,145.326
  Top Layer w0.5: R30.2@106.09,146.939 106.09,146.471 R29.2@103.877,144.259 105.028,144.259 106.298,142.989 107.429,142.989 110.108,145.669 112.636,145.669 114.172,144.132 J3.1@114.173,142.862 ; v2(140.843,119.494) 141.35,118.986 v2(141.351,118.859) 141.858,118.605 v2(142.113,118.605) 146.811,110.712 146.811,109.334 v2(145.923,108.445) v2(145.923,107.667) ; v2@145.922,107.667 v2(146.304,107.048) ; Q10.2@150.968,69.009 151.642,69.009 C47.2@153.923,66.728 ; U9.3@151.064,62.341 152.651,62.341 155.066,64.757 155.066,65.9 154.238,66.728 C47.2@153.923,66.728 ; v1(154.178,80.251) v1(154.178,79.274) v1(154.178,78.333) v1(154.178,77.336) 154.178,73.477 J2.2@154.305,73.35 ; J2.2@154.305,73.35 154.812,72.842 154.812,67.614 C47.2@153.923,66.728
  Bottom Layer w0.5: J3.1@113.878,142.363 cw(c72.771,72.885) 137.822,120.69 ; 137.822,120.688 139.522,120.688 140.715,119.494 v2(140.843,119.494) ; v2(145.923,107.667) v2(145.923,108.445) ; v2@145.922,107.667 v2(146.304,107.048) ; v2@146.541,107.049 cw(c66.802,69.837) v1(154.178,80.251) v1(154.178,77.336)
B2+: C46.2 J1.2 J2.1 LED28.1 Q9.2 R27.2 R28.2 U10.3 | length 114.9
  Top Layer w0.4: Q9.2@71.562,76.984 69.113,74.536 C46.2@66.994,74.536 70.253,71.277 J1.2@72.771,71.277
  Top Layer w0.5: U10.3@65.021,76.38 65.846,76.38 66.994,75.234 C46.2@66.994,74.536 ; LED28.1@141.947,60.058 144.734,62.844 145.922,62.844 R27.2@145.923,64.548 146.603,64.549 149.682,67.627 149.682,69.659
  Top Layer w0.6: J1.2@72.771,71.277 ccw(c112.395,139.433) 143.894,67.162 143.895,67.937 145.033,69.075 149.097,69.075 151.173,71.15 J2.1@153.035,71.15
B3+: C17.1 D3.1 J1.1 LED27.1 R25.2 R26.2 R39.2 SW1.2 | length 178.2
  Top Layer w0.4: J1.1@71.501,73.477 72.77,74.747
  Top Layer w0.5: LED27.1@66.585,84.95 66.585,81.856 R26.2@67.047,81.394 69.006,81.394 R25.2@69.387,81.775 69.387,79.154 69.341,79.108 70.23,78.219 72.008,78.219 72.77,77.457 72.77,74.747 J1.1@71.501,73.477
  Top Layer w0.75: D3.1@136.016,98.272 135.496,98.272 134.312,97.089 134.312,95.057 134.111,94.856 134.111,90.665 134.619,90.157 135.501,90.157 R39.2@136.905,88.752
  Top Layer w0.8: R39.2@136.905,88.752 137.055,88.752 138.168,87.637 138.17,81.018 C17.1@139.065,80.124
  Bottom Layer w1: 78.231,69.964 74.719,73.477 J1.1@71.501,73.477 74.299,76.276 74.299,75.062 82.77,83.555 cw(c143.637,77.965) 89.405,106.161 ; 78.232,69.964 ccw(c113.03,141.973) 146.488,69.332 147.356,70.2 ccw(c146.829,70.726) 147.574,70.726 ccw(c147.267,70.726) 147.484,70.943 146.558,71.869 139.065,79.362 C17.1@139.065,80.124 ; 89.407,106.159 SW1.2@92.075,106.159
BATVIN: C7.1 C8.2 Q3.3 Q5.3 Q7.3 R3.2 R5.2 SW1.3 U1.2 | length 77.1
  Top Layer w0.254: SW1.3@91.074,104.428 92.501,104.427 97.291,109.217 R3.2@98.424,109.217
  Top Layer w0.5: 106.679,84.188 106.679,81.902 107.314,81.267 U1.2@109.423,81.267
  Top Layer w1: 86.359,91.046 Q7.3@90.805,91.138 Q3.3@101.219,91.138 104.683,91.137 106.679,89.141 106.679,85.712 ; 86.36,91.046 cw(c86.36,92.972) 84.434,92.972 84.434,93.211 cw(c144.78,77.584) 88.022,103.36 ; 88.011,103.365 cw(c91.014,100.362) SW1.3@91.014,104.609 ; C7.1@99.314,75.298 99.441,75.298 101.219,77.076 101.219,79.108 ; C8.2@103.758,77.015 103.758,78.864 101.465,78.864 101.218,79.108 101.218,80.251 106.679,85.712 ; 106.679,83.184 106.679,85.712
C18_1: C18.1 CN2.1 J5.1 Q3.2 Q4.3 U7.18 | length 41.6
  Top Layer w0.254: U7.18@94.312,97.879 95.592,97.879 97.154,96.316 97.218,96.253 v1(98.298,96.253) ; Q3.2@102.169,88.668 102.234,88.735 v1(102.235,90.03)
  Top Layer w0.8: CN2.1@81.719,77.294 J5.1@84.368,75.806 ; J5.1@84.496,75.679 92.372,80.632 98.01,80.632 Q4.3@101.219,83.842 101.218,87.719 Q3.2@102.169,88.668
  Bottom Layer w0.254: v1(98.298,96.253) 102.234,92.316 v1(102.235,90.03)
C18_2: C18.2 D4.1 U7.20 | length 5
  Top Layer w0.254: U7.20@94.312,99.179 96.677,99.179 D4.1@97.155,99.656
  Top Layer w0.8: C18.2@97.154,97.716 D4.1@97.155,99.656
C19_1: C19.1 C20.1 CN2.2 CN2.3 J5.2 J5.3 Q5.2 Q6.3 Q7.2 Q8.3 U7.12 U7.15 | length 90.3
  Top Layer w0.254: v1(91.186,93.967) 94.299,93.967 94.312,93.977 99.644,93.977 C20.1@101.98,96.316 ; v1(91.567,95.364) 92.13,95.928 94.312,95.928 96.082,95.928 96.519,95.491 98.744,95.491 C19.1@99.567,96.316 ; Q7.2@91.755,88.668 92.836,89.751 v1(92.837,90.03) ; Q5.2@97.026,88.668 v1(97.027,90.03)
  Top Layer w0.7: CN2.3@79.986,76.296 78.739,78.359 82.676,80.645 85.874,83.842 Q8.3@90.805,83.842 ; CN2.2@80.853,76.794 80.136,77.978 83.311,79.756 85.343,81.788 94.01,81.788 Q6.3@96.065,83.842
  Top Layer w0.8: J5.3@79.969,73.266 CN2.3@79.986,76.296 ; CN2.2@80.853,76.794 J5.2@82.168,74.536 ; Q8.3@90.805,83.842 90.804,87.719 Q7.2@91.755,88.668 ; Q6.3@96.075,83.842 96.075,87.719 Q5.2@97.026,88.668
  Bottom Layer w0.254: v1(91.186,93.967) 91.186,91.681 v1(92.837,90.03) ; v1(91.567,95.364) 91.82,95.111 91.82,92.062 94.487,89.395 96.392,89.395 v1(97.027,90.03)
C19_2: C19.2 D5.1 U7.17 | length 7.9
  Top Layer w0.254: U7.17@94.312,97.228 95.29,97.228 v1(95.885,96.634) ; v1(98.298,97.269) 99.123,97.269 C19.2@99.567,97.716
  Top Layer w0.8: C19.2@99.567,97.716 D5.1@99.568,99.656
  Bottom Layer w0.254: v1(95.885,96.634) 96.52,97.269 v1(98.298,97.269)
C20_2: C20.2 D6.1 U7.14 | length 11.1
  Top Layer w0.254: U7.14@94.312,95.278 95.844,95.278 96.138,94.983 99.694,94.983 100.837,96.126 100.837,96.573 C20.2@101.98,97.716
  Top Layer w0.8: C20.2@101.98,97.716 D6.1@101.981,99.656
EN: C13.2 KEY1.1 R11.2 U3.3 | length 51.2
  Top Layer w0.254: C13.2@92.57,127.228 93.735,127.228 100.677,134.107 102.234,134.107
  Top Layer w0.3: R11.2@90.576,129.171 90.627,129.171 C13.2@92.57,127.228
  Top Layer w0.4: KEY1.1@85.999,123.623 88.856,126.479 89.788,126.479 90.538,127.228 C13.2@92.57,127.228 ; 102.234,134.099 107.949,138.417 108.203,138.417 108.457,138.163 108.457,123.558 106.794,121.894 U3.3@103.657,121.894